# EAGLE board AvrIsp (EAGLE 4.11)
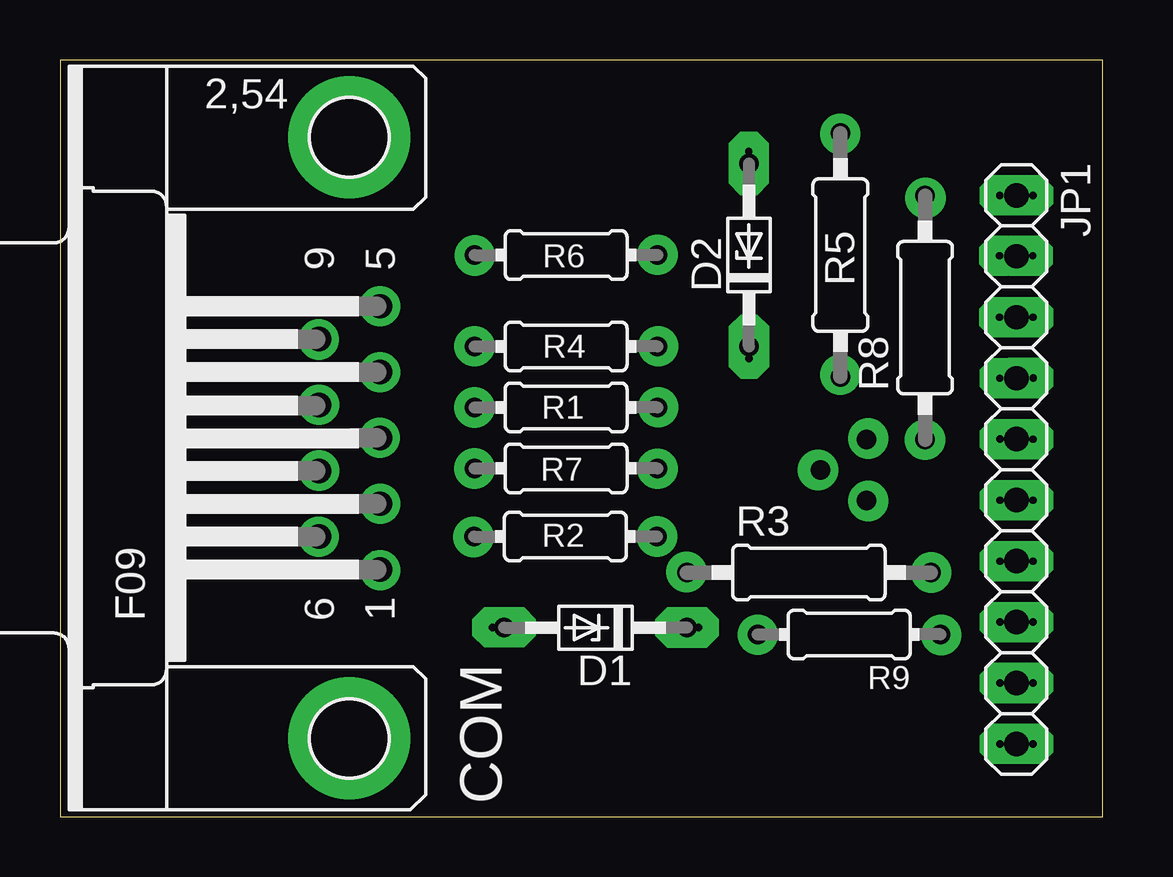
[diagram p0: board, top side]
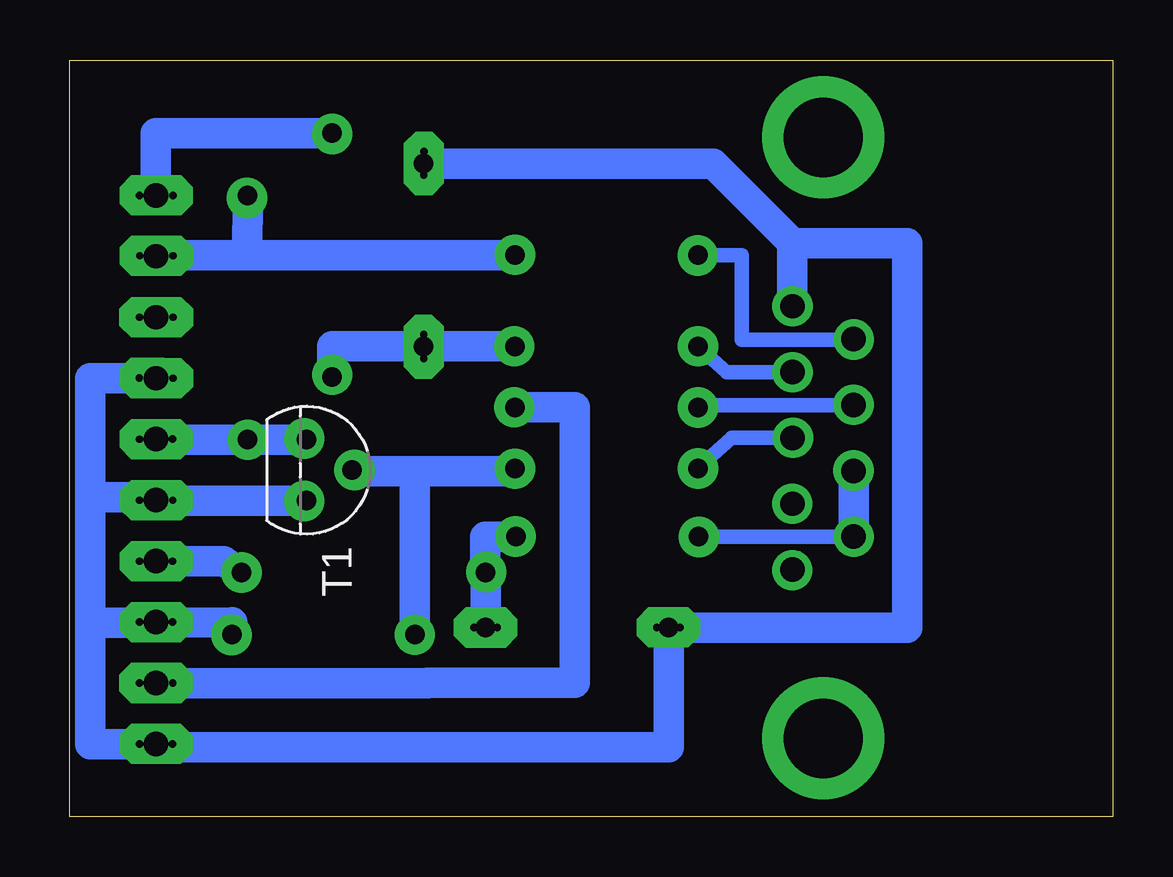
[diagram p1: board, bottom side, seen from below]

Size 43.44 x 31.53 mm. Coordinates in mm from the lower left corner, seen from the top.
Outline: 0,0 43.44,0 43.44,31.53 0,31.53 0,0
Copper layers (1*16): Top 0.035mm / dielectric 1.5mm / Bottom 0.035mm
Design rules "default": minimum track width 10mil, minimum drill 24mil, track to track 8mil, track to pad 8mil, pad to pad 8mil, via to via 8mil, smd to smd 8mil, copper to edge 40mil, drill to drill 8mil, minimum pad ring 10mil, minimum via ring 8mil, stop-mask expansion 4mil, vias tented up to drill 0mil, thermal gap 10mil

## Footprints (pad centres in the part's own frame; a part is rotated, then mirrored left to right if it is on the bottom)
F09HP = drill 1.016 octagon: 1 -5.486,-1.27; 2 -2.743,-1.27; 3 0,-1.27; 4 2.743,-1.27; 5 5.486,-1.27; 6 -4.115,1.27; 7 -1.372,1.27; 8 1.372,1.27; 9 4.115,1.27 | drill 3.302 pad 5.08 round: G1 -12.522,0; G2 12.522,0
DO34Z7 = drill 0.813 long: A 3.81,0; C -3.81,0
1X10 = drill 1.016 long: 1 -11.43,0; 2 -8.89,0; 3 -6.35,0; 4 -3.81,0; 5 -1.27,0; 6 1.27,0; 7 3.81,0; 8 6.35,0; 9 8.89,0; 10 11.43,0
2X05 = drill 1.016 octagon: 1 -5.08,-1.27; 2 -5.08,1.27; 3 -2.54,-1.27; 4 -2.54,1.27; 5 0,-1.27; 6 0,1.27; 7 2.54,-1.27; 8 2.54,1.27; 9 5.08,-1.27; 10 5.08,1.27
0204/7 = drill 0.813 octagon: 1 -3.81,0; 2 3.81,0
0207/10 = drill 0.813 octagon: 1 -5.08,0; 2 5.08,0
TO92 = drill 0.813 octagon: 1 1.27,0; 2 0,1.905; 3 -1.27,0

## Placement (x,y rotation side)
COM  [F09HP]  12.06,15.78 90 top
D1  5V1  [DO34Z7]  22.31,7.88 180 top
D2  5V1  [DO34Z7]  28.71,23.4 90 top
JP1  [1X10]  39.85,14.46 270 top
JP2  [2X05]  3.84,-10.17 0 top  (outside the outline)
R1  470  [0204/7]  21.09,17.05 0 top
R2  4K7  [0204/7]  21.06,11.68 0 top
R3  470  [0207/10]  31.2,10.18 0 top
R4  4K7  [0204/7]  21.09,19.59 0 top
R5  470  [0207/10]  32.52,23.4 90 top
R6  470  [0204/7]  21.09,23.4 0 top
R7  10K  [0204/7]  21.09,14.51 0 top
R8  10K  [0207/10]  36.04,20.8 90 top
R9  15K  [0204/7]  32.88,7.59 180 top
T1  BC547  [TO92]  33.59,14.44 270 bottom

## Library data of the parts
COM = con-subd
D1 D2 = diode
JP1 JP2 = pinhead
R1-R9 = rcl
T1 = transistor

## Nets
GND: COM.5 D1.A D2.A JP1.4 JP1.6 JP1.8 JP1.10 R9.1 T1.1
MISO: JP1.9 R1.2
MOSI: JP1.1 R5.2
N$1: D1.C R2.2 R3.1
N$2: D2.C R4.2 R5.1
N$3: COM.8 R1.1
N$4: COM.6 COM.7 R2.1
N$5: COM.4 R4.1
N$8: R7.2 R9.2 T1.2
N$9: COM.9 R6.1
N$10: COM.3 R7.1
N$83: JP2.1
N$84: JP2.5
N$85: JP2.7
N$86: JP2.9
N$87: JP2.2
N$88: JP2.4 JP2.6 JP2.8 JP2.10
RST: JP1.5 R8.1 T1.3
SCK: JP1.7 R3.2
VCC: JP1.2 R6.2 R8.2

## Tracks (layer width: path | path; a pad name or v marks a point on that pad's centre or on a via)
GND
  Bottom 0.406: 39.66,13.22 39.66,13.19 JP1.6 | 39.66,13.32 39.66,13.22 | 39.66,13.22 39.88,13.22 39.88,13.17 | 39.88,8.11 39.88,8.12 | 39.88,8.11 JP1.8 | 36.69,7.63 R9.1 | 39.88,8.09 39.88,8.11 | JP1.10 39.85,2.9 39.82,2.9
  Bottom 1.27: 39.88,13.17 T1.1 | 36.69,7.63 36.69,8.11 39.88,8.09 42.54,8.09 42.54,8.15 42.59,8.15 | JP1.4 42.59,18.27 42.59,13.37 | 42.59,8.15 42.59,3.03 39.82,3.03 | 42.59,8.15 42.59,13.37 | 42.59,13.37 42.54,13.37 42.54,13.32 39.66,13.32 | 39.82,3.03 39.82,2.9 18.5,2.9 D1.A 8.55,7.88 8.55,23.89 13.34,23.89 | 39.82,3.03 39.82,3.12 | D2.A 16.65,27.21 13.34,23.91 13.34,23.89 | 13.34,23.89 13.34,23.83 13.34,21.27 COM.5
MISO
  Bottom 0.406: 39.74,5.57 39.74,5.61 | 39.74,5.57 JP1.9 | 39.74,5.57
  Bottom 1.27: R1.2 22.42,17.05 22.42,5.58 28.54,5.58 28.54,5.57 39.74,5.57
MOSI
  Bottom 0.406: 39.87,25.87 39.87,25.89 JP1.1
  Bottom 1.27: R5.2 39.87,28.48 39.87,25.89
N$1
  Bottom 0.406: 26.14,9.79 26.14,9.87 R3.1 26.12,9.88 | 26.12,7.77 D1.C
  Bottom 1.27: R2.2 26.14,11.67 26.14,9.87 | 26.12,9.88 D1.C
N$2
  Bottom 1.27: R4.2 D2.C 32.52,19.59 R5.1
N$3
  Bottom 0.61: R1.1 17.23,17.05 17.23,17.15 COM.8
N$4
  Bottom 0.61: COM.6 16.17,11.67 R2.1
  Bottom 1.27: COM.6 COM.7
N$5
  Bottom 0.61: COM.4 16.07,18.53 R4.1
N$6  (via drill 0.3 pad 1.68)
  other vias: 17.28,23.39
N$7  (via drill 0.3 pad 1.68)
  other vias: 17.27,19.6
N$8
  Bottom 0.406: 31.77,14.4 31.69,14.4 T1.2 | 24.98,14.4 R7.2 | 29.06,14.4 29.06,14.38 29.07,14.38
  Bottom 1.27: 24.98,14.4 29.06,14.4 31.69,14.4 | R9.2 29.07,14.38
N$9
  Bottom 0.406: COM.9 10.91,19.9 10.91,19.88 10.91,19.84
  Bottom 0.61: R6.1 15.46,23.4 15.46,19.88 10.91,19.88
N$10
  Bottom 0.61: COM.3 15.87,15.78 R7.1
N$11  (via drill 0.3 pad 1.68)
  other vias: 17.27,17.05
N$12  (via drill 0.3 pad 1.68)
  other vias: 17.27,14.51
N$13  (via drill 0.3 pad 1.68)
  other vias: 17.23,11.66
N$14  (via drill 0.3 pad 1.68)
  other vias: 24.9,23.42
N$15  (via drill 0.3 pad 1.68)
  other vias: 24.93,19.6
N$16  (via drill 0.3 pad 1.68)
  other vias: 24.93,17.06
N$17  (via drill 0.3 pad 1.68)
  other vias: 24.9,14.5
N$18  (via drill 0.3 pad 1.68)
  other vias: 24.88,11.68
N$19  (via drill 0.3 pad 1.68)
  other vias: 26.1,10.2
N$20  (via drill 0.3 pad 1.68)
  other vias: 29.08,7.59
N$21  (via drill 0.3 pad 1.68)
  other vias: 36.71,7.57
N$22  (via drill 0.3 pad 1.68)
  other vias: 36.3,10.18
N$23  (via drill 0.3 pad 1.68)
  other vias: 33.68,13.15
N$24  (via drill 0.3 pad 1.68)
  other vias: 31.59,14.45
N$25  (via drill 0.3 pad 1.68)
  other vias: 33.68,15.75
N$26  (via drill 0.3 pad 1.68)
  other vias: 36.04,15.7
N$27  (via drill 0.3 pad 1.68)
  other vias: 32.51,18.41
N$28  (via drill 0.3 pad 1.68)
  other vias: 32.51,28.44
N$29  (via drill 0.3 pad 1.68)
  other vias: 36.07,25.78
N$30  (via drill 0.3 pad 1.68)
  other vias: 13.34,10.27
N$31  (via drill 0.3 pad 1.68)
  other vias: 13.34,13.04
N$32  (via drill 0.3 pad 1.68)
  other vias: 10.79,11.67
N$33  (via drill 0.3 pad 1.68)
  other vias: 10.79,14.43
N$34  (via drill 0.3 pad 1.68)
  other vias: 13.32,15.79
N$35  (via drill 0.3 pad 1.68)
  other vias: 10.79,17.16
N$36  (via drill 0.3 pad 1.68)
  other vias: 13.33,18.52
N$37  (via drill 0.3 pad 1.68)
  other vias: 10.79,19.89
N$38  (via drill 0.3 pad 1.68)
  other vias: 13.34,21.27
N$39  (via drill 0.3 pad 1.68)
  other vias: 25.64,7.88
N$40  (via drill 0.3 pad 1.68)
  other vias: 26.6,7.88
N$41  (via drill 0.3 pad 1.68)
  other vias: 26.15,7.88
N$42  (via drill 0.3 pad 1.68)
  other vias: 18.99,7.89
N$43  (via drill 0.3 pad 1.68)
  other vias: 18.02,7.89
N$44  (via drill 0.3 pad 1.68)
  other vias: 18.48,7.89
N$45  (via drill 0.3 pad 1.68)
  other vias: 28.7,27.71
N$46  (via drill 0.3 pad 1.68)
  other vias: 28.7,26.74
N$47  (via drill 0.3 pad 1.68)
  other vias: 28.7,27.3
N$48  (via drill 0.3 pad 1.68)
  other vias: 28.7,19.09
N$49  (via drill 0.3 pad 1.68)
  other vias: 28.7,20.09
N$50  (via drill 0.3 pad 1.68)
  other vias: 28.7,19.6
N$51  (via drill 0.3 pad 1.68)
  other vias: 39.15,25.89
N$52  (via drill 0.3 pad 1.68)
  other vias: 40.54,25.89
N$53  (via drill 0.3 pad 1.68)
  other vias: 39.84,25.89
N$54  (via drill 0.3 pad 1.68)
  other vias: 39.15,23.37
N$55  (via drill 0.3 pad 1.68)
  other vias: 40.53,23.37
N$56  (via drill 0.3 pad 1.68)
  other vias: 39.87,23.37
N$57  (via drill 0.3 pad 1.68)
  other vias: 39.15,20.81
N$58  (via drill 0.3 pad 1.68)
  other vias: 40.55,20.81
N$59  (via drill 0.3 pad 1.68)
  other vias: 39.85,20.81
N$60  (via drill 0.3 pad 1.68)
  other vias: 39.15,18.27
N$61  (via drill 0.3 pad 1.68)
  other vias: 40.55,18.28
N$62  (via drill 0.3 pad 1.68)
  other vias: 39.85,18.28
N$63  (via drill 0.3 pad 1.68)
  other vias: 39.16,15.73
N$64  (via drill 0.3 pad 1.68)
  other vias: 40.54,15.73
N$65  (via drill 0.3 pad 1.68)
  other vias: 39.85,15.73
N$66  (via drill 0.3 pad 1.68)
  other vias: 39.16,13.19
N$67  (via drill 0.3 pad 1.68)
  other vias: 40.54,13.19
N$68  (via drill 0.3 pad 1.68)
  other vias: 39.85,13.19
N$69  (via drill 0.3 pad 1.68)
  other vias: 39.16,10.65
N$70  (via drill 0.3 pad 1.68)
  other vias: 40.54,10.65
N$71  (via drill 0.3 pad 1.68)
  other vias: 39.85,10.65
N$72  (via drill 0.3 pad 1.68)
  other vias: 39.16,8.11
N$73  (via drill 0.3 pad 1.68)
  other vias: 40.54,8.11
N$74  (via drill 0.3 pad 1.68)
  other vias: 39.86,8.11
N$75  (via drill 0.3 pad 1.68)
  other vias: 39.16,5.57
N$76  (via drill 0.3 pad 1.68)
  other vias: 40.54,5.57
N$77  (via drill 0.3 pad 1.68)
  other vias: 39.85,5.57
N$78  (via drill 0.3 pad 1.68)
  other vias: 39.17,3.04
N$79  (via drill 0.3 pad 1.68)
  other vias: 40.54,3.04
N$80  (via drill 0.3 pad 1.68)
  other vias: 39.85,3.04
N$81  (via drill 0.3 pad 3.81)
  other vias: 12.02,28.25
N$82  (via drill 0.3 pad 3.81)
  other vias: 12.05,3.23
N$88  (3 unrouted)
RST
  Bottom 0.406: R8.1 36.06,15.68 | 39.92,15.73 39.92,15.74 | 39.92,15.73 JP1.5 | 39.92,15.72 39.92,15.73
  Bottom 1.27: T1.3 R8.1 | R8.1 39.92,15.72
SCK
  Bottom 0.406: 39.92,10.64 JP1.7
  Bottom 1.27: R3.2 37.03,10.64 JP1.7
VCC
  Bottom 0.406: JP1.2 39.86,23.4 | 36.08,23.4 36.05,23.45
  Bottom 1.27: R6.2 36.08,23.4 39.86,23.4 | 36.05,23.45 R8.2